# EAGLE board debug-port-plug (EAGLE 9.6.1)
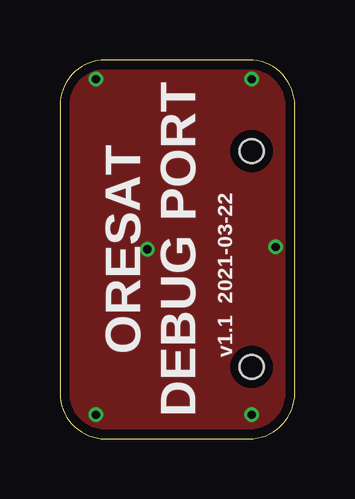
[diagram p0: board, top side]
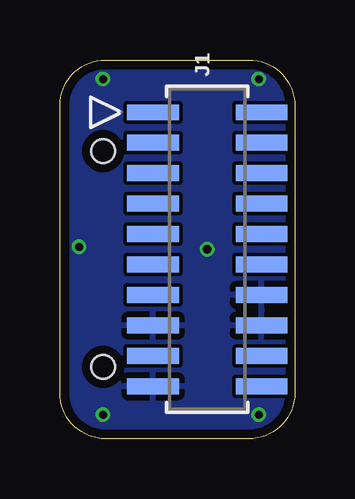
[diagram p1: board, bottom side, seen from below]

Size 9.8 x 15.8 mm. Coordinates in mm from the lower left corner, seen from the top.
Outline: 1.9,0 7.9,0 arc90 9.8,1.9 9.8,13.9 arc90 7.9,15.8 1.9,15.8 arc90 0,13.9 0,1.9 arc90 1.9,0
Copper layers (1*16): Top 0.035559375mm / dielectric 1.6mm / Bottom 0.035559375mm
Design rules "oshpark-2layer-tented": minimum track width 6mil, minimum drill 10mil, track to track 6mil, track to pad 6mil, pad to pad 6mil, via to via 6mil, smd to smd 6mil, copper to edge 15mil, drill to drill 6mil, minimum pad ring 5mil, minimum via ring 5mil, stop-mask expansion 2.5mil, vias tented up to drill 20mil, thermal gap 10mil
Holes 1 mm at 8,3 8,12

## Footprints (pad centres in the part's own frame; a part is rotated, then mirrored left to right if it is on the bottom)
CONN20_M50-3101045_HRW = smd 0.66 x 2.159: 1 5.715,2.265; 2 5.715,-2.265; 3 4.445,2.265; 4 4.445,-2.265; 5 3.175,2.265; 6 3.175,-2.265; 7 1.905,2.265; 8 1.905,-2.265; 9 0.635,2.265; 10 0.635,-2.265; 11 -0.635,2.265; 12 -0.635,-2.265; 13 -1.905,2.265; 14 -1.905,-2.265; 15 -3.175,2.265; 16 -3.175,-2.265; 17 -4.445,2.265; 18 -4.445,-2.265; 19 -5.715,2.265; 20 -5.715,-2.265

## Placement (x,y rotation side)
J1  M50-3101045  [CONN20_M50-3101045_HRW]  3.65,7.9 90 bottom

## Library data of the parts
J1 = J-Harwin-M50-3101045-20pin-F-SMT-1.27mm; BUILT_BY: EMA_Kyle; COPYRIGHT: Copyright (C) 2018 Accelerated Designs. All rights reserved; DATASHEET: https://cdn.harwin.com/pdfs/M50-310.pdf; MANUFACTURER_PART_NUMBER: M50-3101045; SOURCELIBRARY: Harwin_2020-02-18; VENDOR: Harwin

## Nets
GND: J1.14 J1.15 J1.16 J1.19

## Tracks (layer width: path | path; a pad name or v marks a point on that pad's centre or on a via)
GND  (via drill 0.35)
  other vias: 8,1 1.5,1 8,15 9,8 3.65,7.9 1.5,15
  pour Top: 0,0 0,16 10,16 10,0
  pour Bottom: 0,0 0,16 10,16 10,0

## Text on the board
tPlace: ORESAT | DEBUG PORT | v1.1 2021-03-22
tDocu: Top faces out / towards space. / Bottom faces / in towards / backplane.